# Altium PCB B215.PcbDoc
Units mm, origin at the board's own origin, x right, y up, seen from the top; angles counter-clockwise.
Board outline 22 x 40 mm, 4 copper layers (Top, Layer 1, Layer 2, Bottom), stack 1.564 mm thick; 29 components, 35 nets, 121 pads, 151 vias.
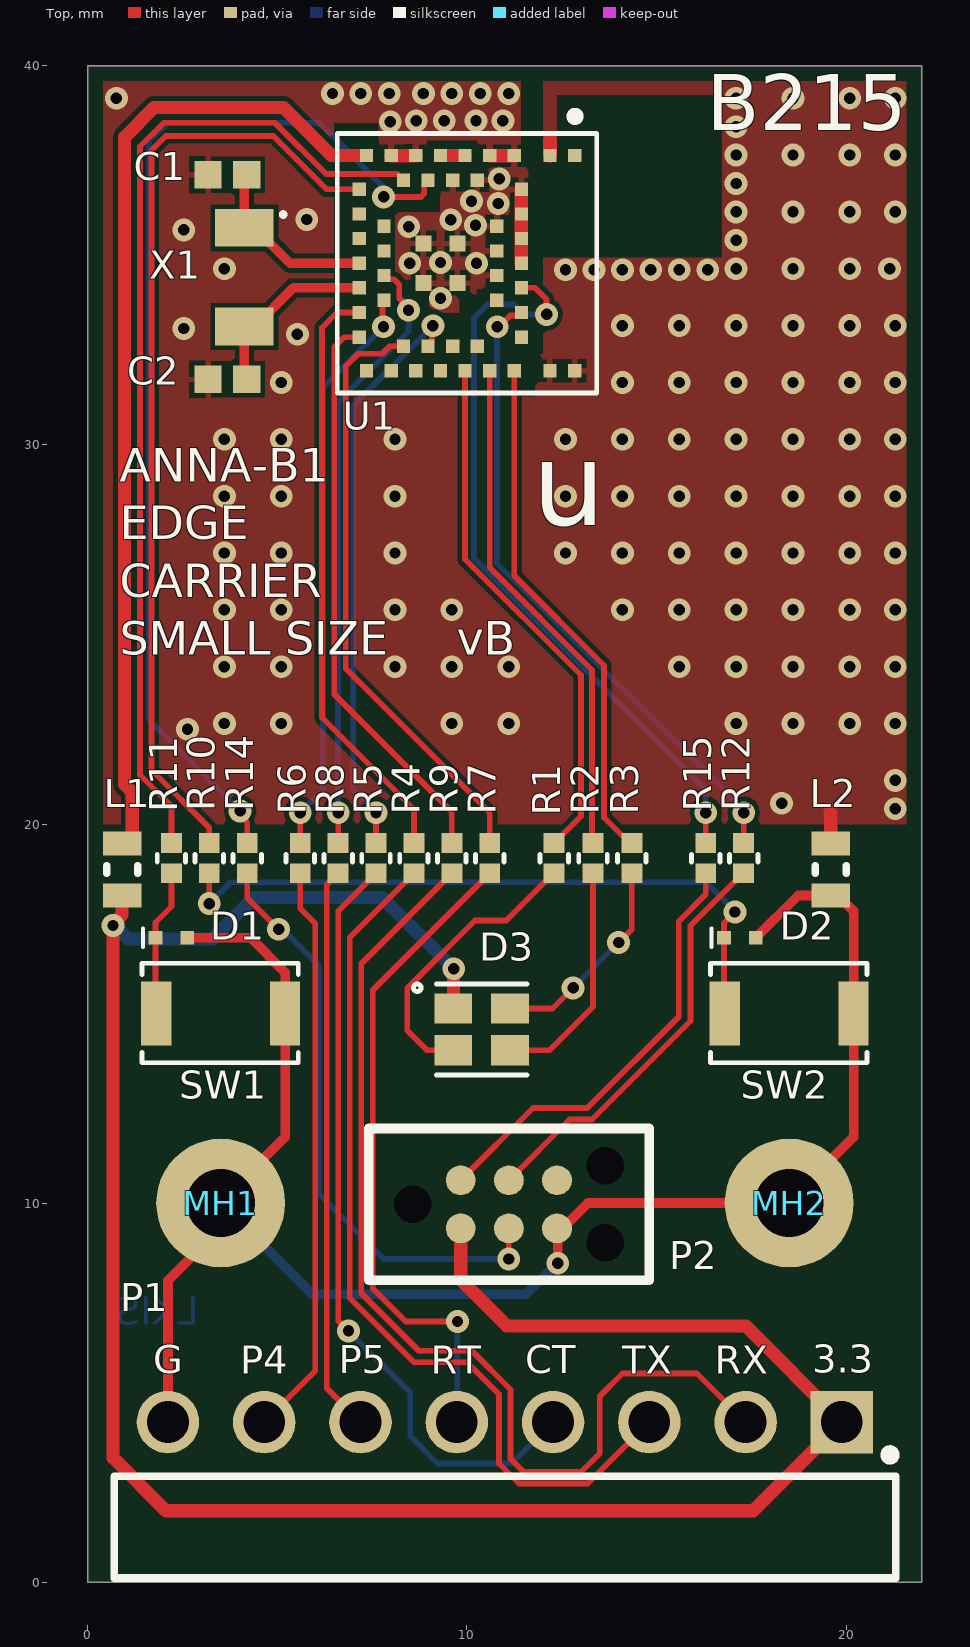
[diagram p0: Top view]
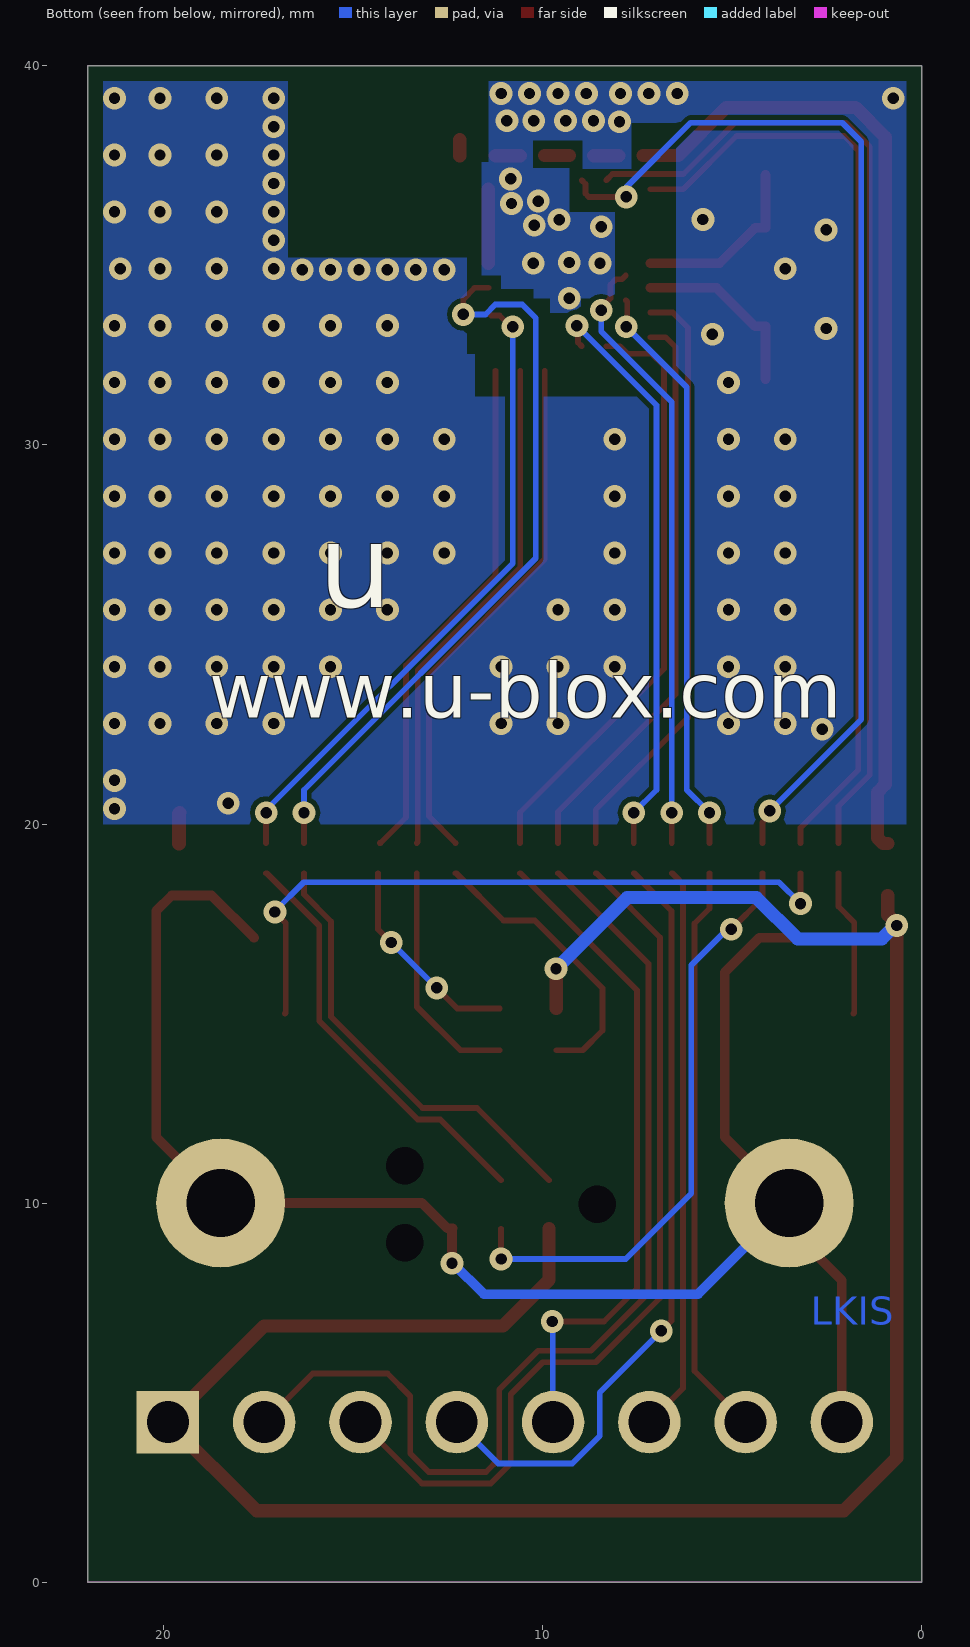
[diagram p1: Bottom view, seen from below]
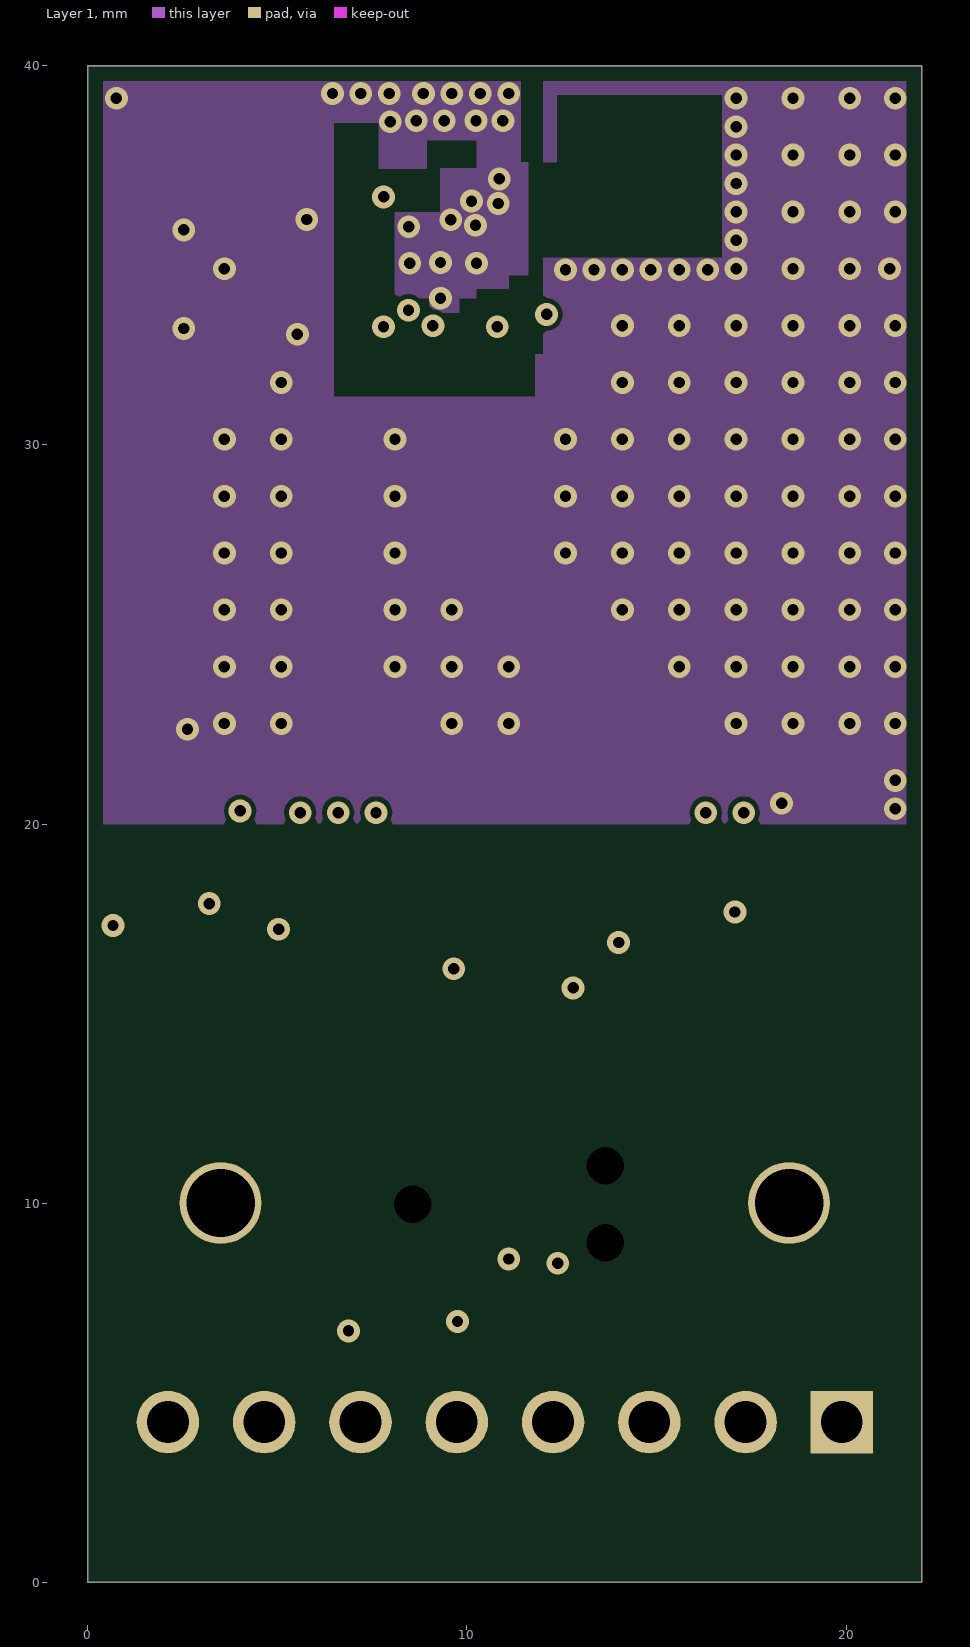
[diagram p2: Layer 1]
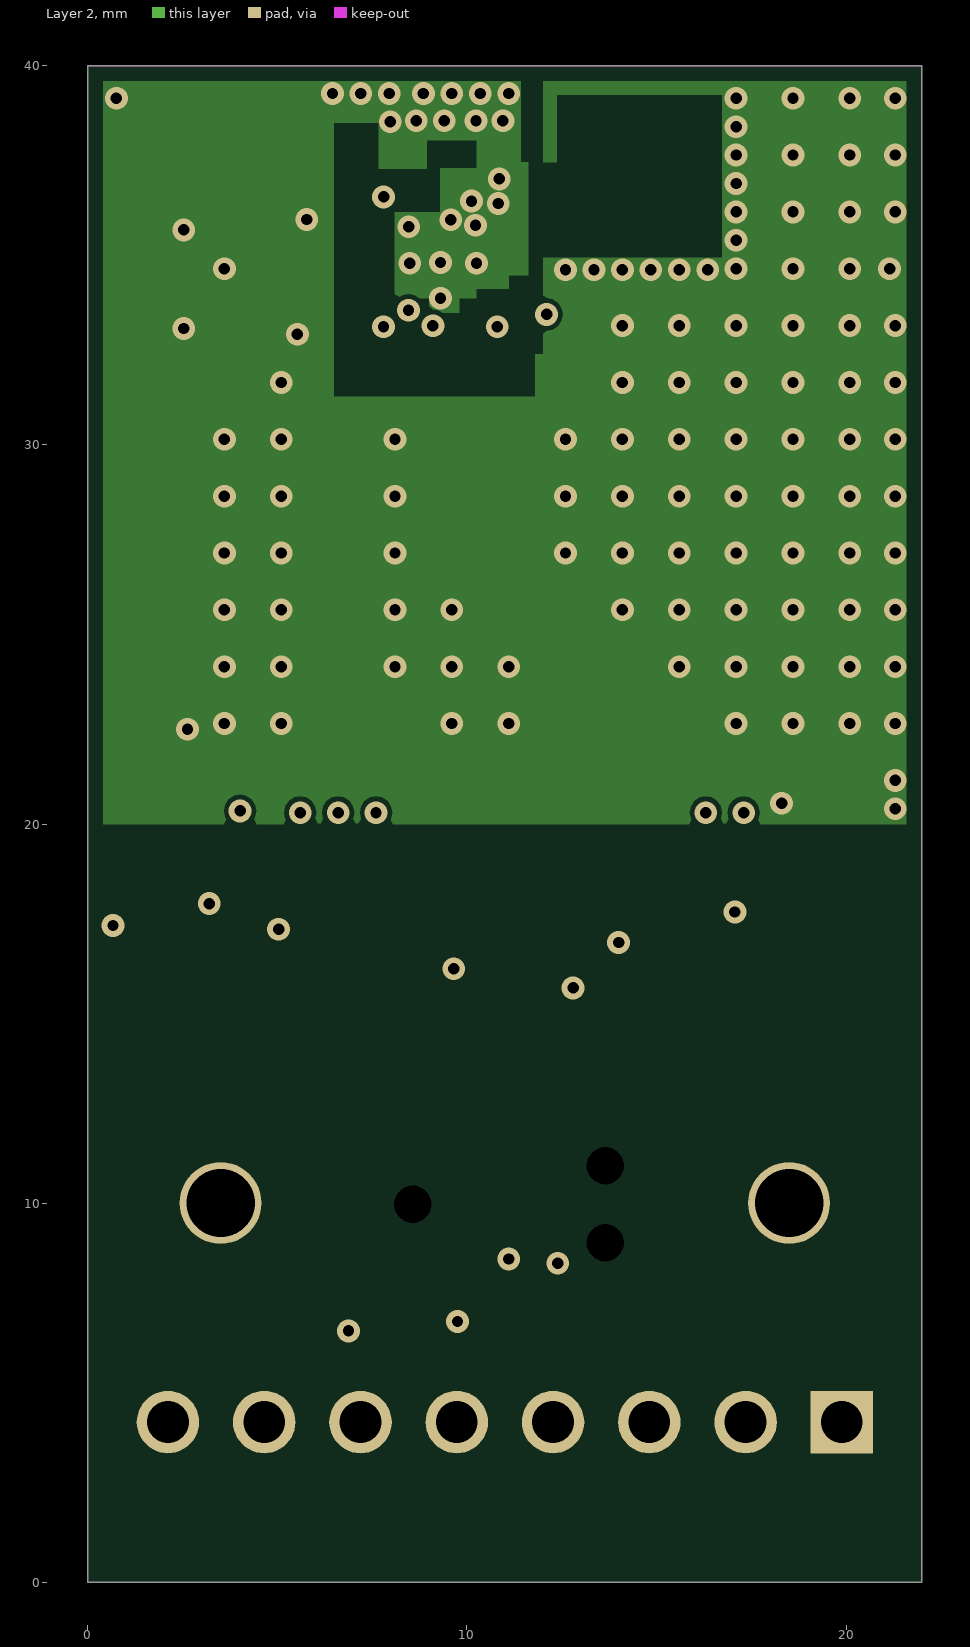
[diagram p3: Layer 2]

## Layer stack, top to bottom
Top Solder: solder mask 0.0203, Solder Resist, Dk 3.5
Top: signal copper 0.0406
Dielectric 1: prepreg 0.0711, PP-006, Dk 4.1
Layer 1: signal copper 0.035
Core: core 1.27, Core-043, Dk 4.3
Layer 2: signal copper 0.035
Dielectric 2: prepreg 0.0711, PP-006, Dk 4.1
Bottom: signal copper 0.0406
Bottom Solder: solder mask 0.0203, Solder Resist, Dk 3.5

## Board outline
0,0 22,0 22,40 0,40

## Design rules (kind name [scope] priority, off if disabled: settings)
BoardOutlineClearance [All] p1: gap=0.4 ignorepadtopadclearanceinfootprint=FALSE
Clearance "Stitching GND" [IsStitchingVia and InNet('GND') vs (IsVia and (Not IsStitchingVia)) Or IsPad] p1: gap=0.127 ignorepadtopadclearanceinfootprint=TRUE
Clearance Clearance_Poly [InPolygon vs OnLayer('Keep-Out Layer') OR (OnLayer('Multi-Layer') AND IsPad  AND Not(PadIsPlated))] p2: gap=0.127 ignorepadtopadclearanceinfootprint=TRUE
Clearance [All] p3: gap=0.127 ignorepadtopadclearanceinfootprint=FALSE except(0: Arc-Text Arc-Hole Track-Text Track-Hole SMDPad-Text SMDPad-Hole THPad-Text THPad-Hole Via-Text Via-Hole Fill-Text Fill-Hole Poly-Text Poly-Hole Region-Text Region-Hole Text-Text Text-Hole)
ComponentClearance [All] p1: gap=0.127 collisioncheckmode=3 verticalgap=0.254 showdistances=FALSE
DiffPairsRouting .14 [All] p1: maxlimit=0.254 minlimit=0.1 mostfreqgap=0.254 toplayer_maxgap=0.1 toplayer_prefgap=0.1 toplayer_minwidth=0.1 toplayer_maxwidth=0.1 toplayer_prefwidth=0.1 midlayer1_mingap=0.254 midlayer1_minwidth=0.381 midlayer1_maxwidth=0.381 midlayer1_prefwidth=0.381 midlayer2_mingap=0.254 midlayer2_minwidth=0.381 midlayer2_maxwidth=0.381 midlayer2_prefwidth=0.381 bottomlayer_maxgap=0.1 bottomlayer_prefgap=0.1 bottomlayer_minwidth=0.1 bottomlayer_maxwidth=0.1 bottomlayer_prefwidth=0.1 maxuncoupledlength=12.7
Height [All] p1: minheight=0 maxheight=25.4 prefheight=2.54
HoleSize [All] p1: absolutevalues=TRUE maxlimit=2540 minlimit=0.127 maxpercent=80.000 minpercent=20.000
HoleToHoleClearance [All] p1: gap=0.152 allowstackedmicrovias=TRUE
MinimumSolderMaskSliver [All] p1: minsoldermaskwidth=0.025
PlaneClearance [InPoly] p1: clearance=0.254
PlaneConnect [All] p1: pad.planeconnectstyle=Relief pad.reliefexpansion=0.508 pad.reliefentries=4 pad.reliefconductorwidth=0.254 pad.reliefairgap=0.254 via.planeconnectstyle=Direct via.reliefexpansion=0.508 via.reliefentries=4 via.reliefconductorwidth=0.254 via.reliefairgap=0.254
PolygonConnect ThermalVias [IsVia] p1: connectstyle=Direct reliefconductorwidth=0.254 reliefentries=4 polygonreliefangle="90 Angle" airgapwidth=0.254
PolygonConnect "PolygonConnect - Power" [InNetClass('')] p2: connectstyle=Relief reliefconductorwidth=0.254 reliefentries=4 polygonreliefangle="90 Angle" airgapwidth=0.127
PolygonConnect PolygonConnect-BGA [InComponentClass('')] p3: connectstyle=Relief reliefconductorwidth=0.152 reliefentries=4 polygonreliefangle="45 Angle" airgapwidth=0.152
PolygonConnect PolygonConnect-General [All] p4: connectstyle=Relief reliefconductorwidth=0.152 reliefentries=4 polygonreliefangle="90 Angle" airgapwidth=0.127
RoutingLayers [All] p1: top layer_v5=TRUE mid layer 1_v5=FALSE mid layer 2_v5=TRUE bottom layer_v5=TRUE
RoutingVias [All] p1: holewidth=0.3 width=0.6 viastyle="Through Hole" minholewidth=0.2 minwidth=0.5 maxholewidth=7 maxwidth=1
SMDEntry [All] p1 off: side=TRUE corner=TRUE anyangle=TRUE
SilkToBoardRegionClearance [All] p1 off:
SilkToSilkClearance [All] p1 off: silktosilkclearance=0.025
SilkToSolderMaskClearance [IsPad] p1 off: minsilkscreentomaskgap=0 clearancetoexposedcopper=TRUE
SolderMaskExpansion SolderMaskExpansion_via [IsVia] p1: expansion=-0.254 istentingtop=TRUE
SolderMaskExpansion [All] p2: expansion=0.05 istentingtop=FALSE
UnRoutedNet [All] p1: checkbadconnections=TRUE
ViasUnderSMD [All] p1: allowed=FALSE
Width [All] p1: maxlimit=0.36 minlimit=0.127 preferedwidth=0.152 toplayer_prefwidth=0.152 bottomlayer_prefwidth=0.152 minimp=50.000000 maximp=50.000000 favimp=50.000000
Width Width_1 [All] p2: maxlimit=0.36 minlimit=0.254 preferedwidth=0.254
17 further rules are at their usual default settings.

## Components (designator, comment, footprint, x,y, rotation, side; value= is the part's Value field where it differs from the comment)
C1 "Capacitor 10 pF +/- 5% 50 V 0402" CAPC1005X55X25ML05T05 3.675,37.131 r180 top value=10pF
C2 "Capacitor 10 pF +/- 5% 50 V 0402" CAPC1005X55X25ML05T05 3.675,31.731 r180 top value=10pF
D1 "110-00019" SOD-923 2.2,17 r0 top
D2 "110-00019" SOD-923 17.2,17 r0 top
D3 "115-00011" 4-PLCC 10.389,14.58 r180 top
L1 "LQW18AN56NJ00D" INDC1608X100X30LL20T10 0.9,18.8 r270 top
L2 "LQW18AN56NJ00D" INDC1608X100X30LL20T10 19.6,18.8 r90 top
MH1 "MH_M1.5DNP" MH_M1.5 3.5,10 r0 top
MH2 "MH_M1.5DNP" MH_M1.5 18.5,10 r0 top
P1 "61300811021" 61300811021 11,1.45 r0 top
P2 "TC2030-IDC-NLDNP" TC2030-IDC-NL 8.565,9.965 r0 top
R1 "180-00031499R" "RES 0402 HD" 12.3,19.1 r270 top value=499R
R2 "180-00098220R" "RES 0402 HD" 13.325,19.1 r270 top value=220R
R3 "180-00098220R" "RES 0402 HD" 14.35,19.1 r270 top value=220R
R4 "180-00098220R" "RES 0402 HD" 8.6,19.1 r270 top value=220R
R5 "180-00098220R" "RES 0402 HD" 7.6,19.1 r270 top value=220R
R6 "180-00098220R" "RES 0402 HD" 5.6,19.1 r270 top value=220R
R7 "180-00098220R" "RES 0402 HD" 10.6,19.1 r270 top value=220R
R8 "180-00098220R" "RES 0402 HD" 6.6,19.1 r270 top value=220R
R9 "180-00098220R" "RES 0402 HD" 9.6,19.1 r270 top value=220R
R10 "180-00098220R" "RES 0402 HD" 3.2,19.1 r270 top value=220R
R11 "180-00098220R" "RES 0402 HD" 2.2,19.1 r270 top value=220R
R12 "180-00098220R" "RES 0402 HD" 17.3,19.1 r90 top value=220R
R14 "180-00098220R" "RES 0402 HD" 4.2,19.1 r90 top value=220R
R15 "180-00098220R" "RES 0402 HD" 16.3,19.1 r90 top value=220R
SW1 "135-00007" B3U-1000P 3.5,15 r0 top
SW2 "135-00007" B3U-1000P 18.5,15 r0 top
U1 "ANNA-B112-OPENCPU" ANNA_LGA52S_650X650 10,34.796 r270 top
X1 "100-00005" XTAL_3215 4.125,34.431 r270 top

## Footprints (in the part's own frame and the unit in brackets; to place one, negate y for a bottom-side part, rotate by r counter-clockwise, add the part's x,y. Pads: shape width x height; smd on the part's side, far side on the other; paste and mask are expansions set on the pad)
4-PLCC [mm] "4 Pin Plastic Leaded Chip Carrier, 2mm x 2mm"
  rect 1x0.8 smd: 1(0.75,-0.55) 2(-0.75,-0.55) 3(-0.75,0.55) 4(0.75,0.55)
  silkscreen extent -1.2,-1.2 1.8,1.2, body extent -1.05,-1.05 1.05,1.05, height 1.01
61300811021 [mm]
  rect 1.65x1.65 hole 1.1: 1(8.89,2.77)
  round 1.65 hole 1.1: 2(6.35,2.77) 3(3.81,2.77) 4(1.27,2.77) 5(-1.27,2.77) 6(-3.81,2.77) 7(-6.35,2.77) 8(-8.89,2.77)
  silkscreen extent -10.31,-1.35 10.31,2.03, body extent -10.16,-7.27 10.16,3.09, height 2.58
ANNA_LGA52S_650X650 [mm]
  rect 0.35x0.35 smd paste+0 mask+0.05: 1(-2.84,2.84) 2(-2.84,2.19) 3(-2.84,1.248) 4(-2.84,0.598) 5(-2.84,-0.052) 6(-2.84,-0.702) 7(-2.84,-1.352) 8(-2.84,-2.002) 9(-2.84,-2.652) 10(-2.19,0.273) 11(-2.19,-0.377) 12(-2.19,-1.027) 13(-2.19,-1.677) 14(-1.95,-2.84) 15(-1.3,-2.84) 17(0,-2.84) 18(0.65,-2.84) 20(1.95,-2.84) 21(-0.975,-2.19) 23(0.325,-2.19) 24(0.975,-2.19) 25(2.84,-2.652) 26(2.84,-2.002) 27(2.84,-1.352) 28(2.84,-0.702) 29(2.84,-0.052) 30(2.84,0.598) 31(2.84,1.248) 32(2.84,2.19) 33(2.84,2.84) 34(2.19,-1.677) 35(2.19,-1.027) 36(2.19,-0.377) 37(2.19,0.273) 38(1.95,1.435) 39(1.3,1.435) 40(0.65,1.435) 41(0,1.435) 42(-0.65,1.435) 43(-1.3,1.435) 44(-1.95,1.435) 46(0.325,0.785) 48(-0.975,0.785)
  rect 0.35x0.35 smd mask+0.05: 16(-0.65,-2.84) 19(1.3,-2.84) 22(-0.325,-2.19) 45(0.975,0.785) 47(-0.325,0.785)
  rect 0.42x0.42 smd paste+0 mask+0.05: 49(-0.52,-0.252) 50(-0.52,-1.152) 51(0.52,-1.152) 52(0.52,-0.252)
  silkscreen extent -3.97,-3.42 3.42,3.43, body extent -3.25,-3.25 3.25,3.25, height 1.2
B3U-1000P [mm] "Button Tactile, SMT 4mm x 2.5mm, height 1.2mm"
  rect 0.8x1.7 smd: 1(-1.7,0) 2(1.7,0)
  silkscreen extent -2.07,-1.3 2.05,1.33, body extent -2,-1.25 2,1.25, height 1.6
CAPC1005X55X25ML05T05 [mm] "Chip Capacitor, 2-Leads, Body 1.05x0.55mm, IPC Low Density"
  rect 0.72x0.72 smd: 1(-0.51,0) 2(0.51,0)
  body extent -0.53,-0.28 0.53,0.28, height 0.55
INDC1608X100X30LL20T10 [mm] "Chip Inductor, 2-Leads, Body 1.8x1.1mm, IPC High Density"
  rect 0.64x1.02 smd: 1(-0.685,0) 2(0.685,0)
  silkscreen extent -0.1,-0.41 0.1,0.41, body extent -0.9,-0.55 0.9,0.55, height 1
MH_M1.5 [mm] "Mounting Hole M1.5 Metric, 3.4mm diameter pad"
  round 3.4 / inner round 2.159 / far side round 3.4 hole 1.8: 1(0,0)
"RES 0402 HD" [mm] "Chip Resistor, 2-Leads, Body 1.05x0.54mm, IPC High Density"
  rect 0.52x0.55 smd: 1(-0.4,0) 2(0.4,0)
  silkscreen extent -0.1,-0.38 0.1,0.38, body extent -0.55,-0.3 0.55,0.3, height 0.4
SOD-923 [mm] "SOD-923, 2-Leads, Body 1.25x2.50mm, IPC High Density,"
  rect 0.36x0.35 smd mask+0.05: 1(-0.42,0) 2(0.42,0)
  silkscreen extent -0.75,-0.25 -0.75,0.25, body extent -0.4,-0.3 0.4,0.3, height 0.4
TC2030-IDC-NL [mm] "Tag-Connect 6-Pin No Legs"
  round 0.9 hole 0.995 unplated: 0(0,0) 0(5.08,-1.016) 0(5.08,1.016)
  round 0.79 smd paste-0.39: 1(1.27,-0.635) 2(1.27,0.635) 3(2.54,-0.635) 4(2.54,0.635) 5(3.81,-0.635) 6(3.81,0.635)
  silkscreen extent -1.16,-2 6.24,2
XTAL_3215 [mm] "XTAL, 2-Leads, Body 1.50x3.20mm"
  rect 1x1.55 smd: 1(-1.3,0) 2(1.3,0)
  silkscreen extent -1.7,0.98 -1.6,1.07, body extent -1.65,-0.8 1.65,0.8, height 0.9

## Part data
C1 C2: library part CMP-001-00013-4, "Chip Capacitor, 10 pF, +/- 5%, 50 V, 0402 (1005 Metric)", Capacitor Type=Ceramic, Case/Package=0402, Max Operating Temperature=125°C, Min Operating Temperature=-55°C, Tolerance=5%, Voltage Rating=50V, Mounting Technology=SM, Pins=2, RoHS Compliant=True
D1 D2: "Diode, ESD9B, 3.3V, ST5G, SOD-923", Manufacturer="ON Semiconductor", Manufacturer P/N=ESD9B3.3ST5G, MFG Package=SOD-923, Package Type=SOD, Part Name="Diode TVS 3.3V SOD-923", Voltage=3.3V, Arena Link=https://app.bom.com/a/4M5DJQ9Q9SR7DV4H?v=spec.summary, Body Size="0.8mm x 0.6mm", Component Mounting Type=SMT, Diode Type=TVS, Height=0.4mm, Item_Phase=Production, Part Number=110-00019, Part_Type=Diode, Pins=2, Revision=0A, Supplier 1=Arrow, Supplier Part Number 1=ESD9B3.3ST5G, Use in new designs=Yes
D3: "LED, RGB Diffused SMT, PLCC4 4 Pin", Color=RGB, Current="20mA Red, 10mA Green, 10mA, Blue", Manufacturer="Cree, Inc.", Manufacturer P/N=CLMVB-FKA-CFHEHLCBB7a363, MFG Package=PLCC4, Package Type=Custom, Part Name="LED RGB SMT 2mm x 2mm", Supplier Part Number 1=941-CLMVBFKACFHEHLCB, Voltage=5V, Arena Link=https://app.bom.com/a/UCV39GZGZIHY581D?v=spec.summary, Body Size="2.0mm x 2.0mm", Component Mounting Type=SMT, Height=1mm, Item_Phase=Production, Mounting Type=Vertical, Number of Circuits=3, Part Number=115-00011, Part_Type=LED, Pins=4, Revision=0A, Supplier 1=Mouser, Use in new designs=Yes, Vf="2V Red, 3V Green, 3V Blue"
L1 L2: library part CMP-2000-06600-1, "Chip Inductor, 56 nH, +/-5%, 390 mA, -55 to 125 degC, 0603 (1608 Metric), RoHS, Tape and Reel", Current Rating=360mA, DC Resistance (DCR)=290mOhmMax, Frequency - Self Resonant=2.4GHz, Frequency - Test=100MHz, Inductance=56nH, Manufacturer=Murata, Operating Temperature=-55°C~125°C, Package / Case=0603(1608Metric), Package Description="2-Pin Surface Mount Device, Body 1.6 x 0.8 mm", Package Reference=0603, Q @ Freq=38@200MHz, Standard Package=1, Tolerance=±5%, Category=Inductors,Coils,Chokes, Datasheet URL=http://search.murata.co.jp/Ceramy/image/img/PDF/ENG/L0075S0080LQW18A_10.pdf, Datasheet Version=1/2019, Family=FixedInductors, Height - Seated (Max)="0.039\"(1.00mm)", Manufacturer URL=http://www.murata.com/, Material - Core=Non-Magnetic, Mounting Technology=SurfaceMount, Mounting Type=SurfaceMount, Online Catalog=LQWSeries, Other Names=490-6876-1, Packaging=CutTape(CT), Product Training Modules=InductorProductsChipRFInductors, Series=LQW18A_00, Shielding=Unshielded, Size / Dimension="0.063\"Lx0.031\"W(1.60mmx0.80mm)", Type=Wirewound
MH1 MH2: library part MH_M1.5, "1.5M screw mounting hole, plated", Added By="Jeremy D", Added Date=2015-07-09, DNP=DNP, Height=0mm, Part Number=MH_M1.5, Size="3.4mm x 3.4mm", Type="Mounting Hole"
P1: library part CMP-1502-01075-1, "THT Angled Pin Header WR-PHD, Pitch 2.54 mm, Single Row, 8 pins", Contact Resistance=20mOhm, Manufacturer="Wurth Elektronik", Operating Temperature=-40to105degC, Rated Current=3A, Withstanding Voltage=500VAC, Working Voltage=250VAC, Datasheet URL=https://katalog.we-online.de/em/datasheet/6130xx11021.pdf, Gender=Male, Manufacturer Part Number=61300811021, Manufacturer URL=http://www.we-online.de, Mounting Technology=THT, Orientation=Angled, Package Reference=61300811021, Packaging=Bag, Part Number=61300811021, Pin Number=8, Pitch=2.54mm, Publisher=WurthElektronik, Row Number=Single
P2: library part TC2030-IDC-NL, "CON PADS FOR CBL PLUG-OF-NAILS 6-PIN NO LEGS", Manufacturer="TAG Connect", Added By="Paul B", Added Date=2015-04-22, DNP=DNP, Height=0, Manufacturer P/N=TC2030-IDC-NL, Part Number=TC2030-IDC-NL, Size="6.731mm x 12.446mm"
R1: library part 180-00031, "Resistor, 499ohm, 1%, 1/16W, 0402", Manufacturer="Rohm Semiconductor", Manufacturer 2="Samsung Electro-Mechanics America, Inc", Manufacturer P/N=MCR01MRTF4990, Manufacturer P/N 2=RC1005F4990CS, Part Name="RES SMD 499 OHM 1% 1/16W 0402", Power=1/16W, Supplier Part Number 1=RHM499CDCT-ND, Tolerance="+/- 1%", Alternate Footprint Ref="RES 0402", Arena Link=https://app.bom.com/a/Q8RZ5CVCVEDU1SS5?v=spec.summary, Component Mounting Type=SMT, Height=0.4mm, Item_Phase=Production, Part Number=180-00031, Part_Type=Resistor, Pins=2, Revision=0D, Size=0402, Supplier 1=Digi-Key, Supplier 2=Digi-Key, Supplier Part Number 2=1276-3992-1-ND, Use in new designs=Yes
R2 R3: library part 180-00098, "Resistor, 220ohm, 5%, 1/16W, 0402.", Manufacturer="Panasonic Electronic Components", Manufacturer 2="Samsung Electro-Mechanics America, Inc", Manufacturer P/N=ERJ-2GEJ221X, Manufacturer P/N 2=RC1005J221CS, Part Name="RES SMD 220 OHM 5% 1/16W 0402", Power=1/16W, Supplier Part Number 1=P220JCT-ND, Tolerance="+/- 5%", Alternate Footprint Ref="RES 0402", Arena Link=https://app.bom.com/a/8Q9HNUDUDWVBJC30?v=spec.summary, Component Mounting Type=SMT, Height=0.4mm, Item_Phase=Production, Part Number=180-00098, Part_Type=Resistor, Pins=2, Revision=0C, Size=0402, Supplier 1=Digi-Key, Supplier 2=Digi-Key, Supplier Part Number 2=1276-4360-1-ND, Use in new designs=Yes
R4 R5 R6 R7 R8 R9 R10 R11 R12 R14 R15: library part 180-00098, "Resistor, 220ohm, 5%, 1/16W, 0402.", Manufacturer 1="Samsung Electro-Mechanics America, Inc", Manufacturer 2="Panasonic Electronic Components", Manufacturer Part Number 1=RC1005J221CS, Manufacturer Part Number 2=ERJ-2GEJ221X, Max Operating Temp=155, Min Operating Temp=-55, Part Name="RES SMD 220 OHM 5% 1/16W 0402", Power=1/16W, Supplier Part Number 1=1276-4360-1-ND, Tolerance="+/- 5%", Voltage=None, Height=0.4mm, Item Phase="In Production", Part Number=180-00098, Pins=2, Revision=0C, Size=0402, Supplier 1=Digi-Key, Supplier 2=Digi-Key, Supplier Part Number 2=P220JCT-ND, UBX Code=None, Use in new designs=Yes
SW1 SW2: "Button, Momentary SPST-NO, 0.05A, 12V, 3mm x 2.5mm", Current=50mA, Manufacturer="Omron Electronics Inc-EMC Div", Manufacturer P/N=B3U-1000P, Part Name="SWITCH TACTILE SPST-NO 0.05A 12V", Supplier Part Number 1=SW1020CT-ND, Voltage=12VDC, Arena Link=https://app.bom.com/a/TBU28FYFYHGV5FQ0?v=spec.summary, Body Size="3mm x 2.5mm", Component Mounting Type=SMT, Height=1.2mm, Item_Phase=Production, Part Number=135-00007, Part_Type=Button, Pins=2, Revision=0A, Supplier 1=Digi-Key, Switch/Button Circuit=SPST, Switch/Button Function=Off-Mom, Use in new designs=Yes
U1: "u-blox ANNA-B112 Bluetooth 5 LE module", Manufacturer=u-blox, Part Description="Stand-alone Bluetooth low energy module"
X1: "XTAL, 2Pin, 32.768kHz, 7pF 20ppm", Frequency=32.768kHz, Frequency Tolerance=20ppm, Manufacturer=Epson, Manufacturer 2="AVX Corporation", Manufacturer P/N="FC-135 32.7680KA-AG3", Manufacturer P/N 2=ST3215SB32768C0HPWBB, MFG Package=2-SMD, Part Name="XTAL 32.768kHz 7pF 20ppm 3215", Supplier Part Number 1=SER4086CT-ND, Arena Link=https://app.bom.com/a/L3MU07Q7Q98O5PC8?v=spec.summary, Body Size="3.2mm x 1.5mm", CL=7pF, Component Mounting Type=SMT, Height=0.9mm, Item_Phase=Production, Part Number=100-00005, Part_Type=Crystal/Oscillator, Pins=2, Revision=0C, Supplier 1=Digi-Key, Supplier 2=Digi-Key, Supplier Part Number 2=1253-1113-1-ND, Use in new designs=Yes

## Via types
v1: diameter 0.6, hole 0.3, Top to Bottom, tented both sides, 151 vias

## Nets (pads, with @x,y where several pads share a name; then routed paths per layer and width w, separated by ;. In a path a pad name is that pad's centre, name@x,y a point inside that pad or via, vN(x,y) a via of type N, cw(c..) or ccw(c..) an arc to the next point about the centre after c; other vN are vias at no path point)
3V3: D3.1 L1.2 P1.1 P2.1 | length 60.1
  Top w0.35: L1.2 0.9,17.601 0.66,17.361 v1(0.66,17.323) 0.66,3.277 2.057,1.88 17.55,1.88 P1.1 17.354,6.756 11.049,6.756 9.835,7.97 P2.1 ; D3.1 9.644,15.135 9.644,16.172 v1(9.65,16.178) v1@9.652,16.18
  Bottom w0.35: v1(0.66,17.323) 0.703,17.323 1.059,16.967 3.277,16.967 4.369,18.059 7.768,18.059 v1(9.65,16.178)
3V3_M: L1.1 U1.9 | length 26.1
  Top w0.35: L1.1 1.023,19.485 1.168,19.63 1.168,20.841 0.965,21.044 0.965,38.125 1.747,38.907 5.156,38.907 6.427,37.636 U1.9
ANT_INT_EDGE: U1.5 U1.6 | length 0.6
  Top w0.35: U1.6 U1.5
B_M: R3.1 U1.31 | length 13.7
  Top w0.152: U1.31 11.248,26.547 13.613,24.182 13.613,20.172 14.285,19.5 R3.1@14.3,19.5
BLUE: D3.2 R3.2 | length 5.6
  Top w0.152: D3.2 12.255,15.13 v1(12.8,15.675) ; v1(14,16.875) 14.35,17.225 R3.2
  Bottom w0.152: v1(12.8,15.675) v1(14,16.875)
BT1_M: R11.1 U1.13 | length 26.6
  Top w0.152: R11.1 2.2,20.47 1.374,21.296 1.374,37.874 2.004,38.504 4.93,38.504 6.285,37.149 8.16,37.149 U1.13
BT2_M: R10.1 U1.14 | length 25.1
  Top w0.152: R10.1 3.2,19.9 1.678,21.422 1.678,37.778 2.051,38.151 4.889,38.151 6.293,36.746 U1.14
BUTTON1: D1.1 R11.2 SW1.1 | length 3.9
  Top w0.152: SW1.1 1.78,15.02 D1.1 1.78,17.401 2.2,17.821 R11.2
BUTTON2: D2.1 R10.2 SW2.1 | length 18.1
  Top w0.152: v1(3.2,17.9) R10.2 ; SW2.1 16.78,15.02 D2.1 16.78,17.39 v1(17.069,17.678)
  Bottom w0.152: v1(3.2,17.9) 3.766,18.466 16.307,18.466 17.069,17.704 v1(17.069,17.678)
CLK1: C1.1 U1.17 X1.1 | length 4.8
  Top w0.254: C1.1@4.125,37.131 X1.1 4.4,35.731 5.335,34.796 U1.17
CLK2: C2.1 U1.18 X1.2 | length 4.9
  Top w0.254: C2.1@4.125,31.731 X1.2 4.4,33.131 5.415,34.146 U1.18
CTS: P1.4 R5.2 | length 20.6
  Top w0.152: v1(6.875,6.625) 6.604,6.896 6.604,17.704 7.401,18.501 7.401,18.516 7.585,18.7 R5.2
  Bottom w0.152: v1(6.875,6.625) 8.5,5 8.5,3.85 9.225,3.125 11.175,3.125 P1.4
CTS_M: R5.1 U1.35 | length 15.3
  Top w0.152: R5.1 v1(7.6,20.3) ; U1.35 9.072,32.705 v1@9.072,33.118
  Bottom w0.152: v1(7.6,20.3) 7,20.9 7,31.046 v1(9.1,33.146)
G_M: R2.1 U1.30 | length 13.6
  Top w0.152: U1.30 10.598,26.767 13.3,24.065 13.3,19.525 R2.1
GND: D1.2 D2.2 L2.1 MH1.1 MH2.1 P1.8 P2.5 SW1.2 SW2.2 | length 45.3
  Top w0.254: P1.8 2.11,7.954 3.5,9.344 MH1.1 3.5,10.036 5.2,11.736 5.2,16.085 4.285,17 D1.2 ; v1(12.395,8.407) 12.395,9.31 P2.5 12.52,9.33 13.19,10 MH2.1 18.5,10.036 20.2,11.736 SW2.2 20.2,17.705 19.79,18.115 L2.1 18.74,18.115 17.625,17 D2.2
  Bottom w0.254: MH1.1 5.905,7.595 11.557,7.595 12.37,8.407 v1(12.395,8.407)
GND_M: C1.2 C2.2 L2.2 U1.2 U1.3 U1.4 U1.7 U1.8 U1.10 U1.11 U1.32 U1.33 U1.41 U1.42 U1.43 U1.44 U1.46 U1.47 U1.48 U1.49 U1.50 U1.51 U1.52 | length 4.5
  Top w0.36: U1.8 U1.7 ; U1.4 U1.3 ; U1.41 U1.42 U1.43 U1.44 ; U1.2 12.19,38.046 ; 19.583,20.295 19.6,20.278 L2.2
  other v1: 21.3,20.4 18.3,20.55 21.3,21.15 2.625,22.5 3.6,22.65 5.1,22.65 9.6,22.65 11.1,22.65 17.1,22.65 18.6,22.65 20.1,22.65 21.3,22.65 3.6,24.15 5.1,24.15 8.1,24.15 9.6,24.15 11.1,24.15 15.6,24.15 17.1,24.15 18.6,24.15 20.1,24.15 21.3,24.15 3.6,25.65 5.1,25.65 8.1,25.65 9.6,25.65 14.1,25.65 15.6,25.65 17.1,25.65 18.6,25.65 20.1,25.65 21.3,25.65 3.6,27.15 5.1,27.15 8.1,27.15 12.6,27.15 14.1,27.15 15.6,27.15 17.1,27.15 18.6,27.15 20.1,27.15 21.3,27.15 3.6,28.65 5.1,28.65 8.1,28.65 12.6,28.65 14.1,28.65 15.6,28.65 17.1,28.65 18.6,28.65 20.1,28.65 21.3,28.65 3.6,30.15 5.1,30.15 8.1,30.15 12.6,30.15 14.1,30.15 15.6,30.15 17.1,30.15 18.6,30.15 20.1,30.15 21.3,30.15 5.1,31.65 14.1,31.65 15.6,31.65 17.1,31.65 18.6,31.65 20.1,31.65 21.3,31.65 5.525,32.925 2.525,33.075 14.1,33.15 15.6,33.15 17.1,33.15 18.6,33.15 20.1,33.15 21.3,33.15 9.3,33.873 12.6,34.625 13.35,34.625 14.1,34.625 14.85,34.625 15.6,34.625 16.35,34.625 3.6,34.65 17.1,34.65 18.6,34.65 20.1,34.65 21.15,34.65 8.49,34.796 9.3,34.816 10.25,34.796 17.1,35.4 2.525,35.675 8.46,35.756 10.225,35.796 5.775,35.95 9.57,35.946 17.1,36.15 18.6,36.15 20.1,36.15 21.3,36.15 10.825,36.371 10.12,36.436 17.1,36.9 10.85,37.021 17.1,37.65 18.6,37.65 20.1,37.65 21.3,37.65 17.1,38.4 7.976,38.532 8.661,38.557 9.398,38.557 10.236,38.557 10.947,38.557 0.75,39.15 17.1,39.15 18.6,39.15 20.1,39.15 21.3,39.15 6.45,39.275 7.2,39.275 7.95,39.275 8.85,39.275 9.6,39.275 10.35,39.275 11.1,39.275
GREEN: D3.3 R2.2 | length 6.2
  Top w0.152: D3.3 12.175,14.03 13.325,15.18 R2.2
nRESET: P2.3 R14.1 | length 15.8
  Top w0.152: R14.1 4.2,18.05 v1(5.029,17.221) ; v1(11.1,8.522) P2.3@11.1,9.322
  Bottom w0.152: v1(5.029,17.221) 5.134,17.221 6.084,16.271 6.084,10.248 7.81,8.522 v1(11.1,8.522)
nRST_M: R14.2 U1.12 | length 28.2
  Top w0.152: v1(4.013,20.345) 4.013,20.224 4.2,20.037 R14.2 ; v1(7.8,36.546) 8.785,36.546 8.874,36.635 8.874,36.887 U1.12
  Bottom w0.152: v1(4.013,20.345) 1.6,22.759 1.6,38 2.1,38.5 6.1,38.5 v1@7.8,36.8
P0.04: P1.7 R6.2 | length 15.2
  Top w0.152: P1.7 5.996,5.566 5.996,17.372 5.6,17.768 R6.2
P0.04_M: R6.1 U1.24 | length 15.3
  Top w0.152: R6.1 v1(5.6,20.3) ; v1(7.798,33.122) 7.772,33.147 7.772,33.783 U1.24
  Bottom w0.152: v1(5.6,20.3) 6.2,20.9 6.2,31.524 v1(7.798,33.122)
P0.05: P1.6 R8.2 | length 15
  Top w0.152: R8.2 6.585,18.7 6.401,18.516 6.401,18.501 6.3,18.4 6.3,5.11 P1.6
P0.05_M: R8.1 U1.23 | length 16.1
  Top w0.152: R8.1 v1(6.6,20.3) ; U1.23 7.909,34.372 8.074,34.372 8.213,34.233 8.213,33.875 8.458,33.63 v1(8.458,33.553)
  Bottom w0.152: v1(6.6,20.3) 6.596,20.304 6.596,31.132 8.458,32.995 v1(8.458,33.553)
R_M: R1.1 U1.29 | length 14
  Top w0.152: U1.29 9.948,26.987 13.005,23.931 13.005,20.205 R1.1
RED: D3.4 R1.2 | length 7.7
  Top w0.152: D3.4 8.948,14.03 8.425,14.553 8.425,15.664 10.212,17.451 11.036,17.451 12.285,18.7 R1.2
RTS: P1.5 R7.2 | length 17.5
  Top w0.152: v1(9.75,6.875) 8.385,6.875 7.516,7.744 7.516,15.616 10.401,18.501 10.401,18.516 10.585,18.7 R7.2
  Bottom w0.152: P1.5 9.74,4.23 9.74,6.865 v1(9.75,6.875)
RTS_M: R7.1 U1.34 | length 15.9
  Top w0.152: U1.34 7.96,32.606 7.764,32.41 7.13,32.41 6.804,32.084 6.804,24.096 10.6,20.3 R7.1
RXD: P1.2 R9.2 | length 27.7
  Top w0.152: R9.2 9.585,18.7 9.401,18.516 9.401,18.501 7.212,16.312 7.212,7.618 8.726,6.104 10.126,6.104 11.151,5.079 11.151,3.249 11.5,2.9 13.009,2.9 13.5,3.391 13.5,4.9 14.1,5.5 16.07,5.5 P1.2
RXD_M: R9.1 U1.20 | length 15.1
  Top w0.152: U1.20 6.76,32.846 6.5,32.586 6.5,23.421 9.6,20.321 R9.1
SWCLK: P2.4 R12.1 | length 11
  Top w0.152: P2.4 12.705,12.2 13.3,12.2 15.9,14.8 15.9,17.315 17.101,18.516 17.285,18.7 R12.1
SWCLK_M: R12.2 U1.39 | length 17.1
  Top w0.152: v1(10.795,33.122) 10.846,33.122 11.143,33.419 11.358,33.419 U1.39 ; R12.2 v1(17.3,20.3)
  Bottom w0.152: v1(10.795,33.122) 10.795,26.873 17.3,20.368 v1(17.3,20.3)
SWDIO: P2.2 R15.1 | length 11.6
  Top w0.152: P2.2 11.739,12.504 13.174,12.504 15.585,14.915 15.585,17.43 16.3,18.145 R15.1
SWDIO_M: R15.2 U1.40 | length 19.7
  Top w0.152: U1.40 11.8,34.146 12.1,33.846 v1(12.1,33.446) ; R15.2 v1(16.3,20.3)
  Bottom w0.152: v1(12.1,33.446) 11.512,33.446 11.252,33.706 10.541,33.706 10.185,33.35 10.185,27.015 16.3,20.9 v1(16.3,20.3)
TXD: P1.3 R4.2 | length 23.6
  Top w0.152: R4.2 8.585,18.7 8.401,18.516 8.401,18.501 6.908,17.008 6.908,7.492 8.6,5.8 10,5.8 10.846,4.954 10.846,3.124 11.374,2.596 13.186,2.596 P1.3
TXD_M: R4.1 U1.19 | length 15.8
  Top w0.152: U1.19 6.572,33.496 6.172,33.096 6.172,22.809 8.6,20.381 R4.1
pads on no net: P2.0 P2.6 U1.1 U1.15 U1.16 U1.21 U1.22 U1.25 U1.26 U1.27 U1.28 U1.36 U1.37 U1.38 U1.45

## Polygon pours and split planes (outlines as drawn)
GND_M on Top "GND_M_L01_P021" (solid, remove dead copper, pour order 21): 0,39.85 22,39.85 22,20 0,20
GND_M on Top "GND_M_L01_P020" (solid, pour order 20): 12.37,38.22 12.01,38.22 12.01,39.599 16.73,39.599 16.73,39.246 12.37,39.246
GND_M on Bottom "GND_M_L04_P022" (solid, remove dead copper, pour order 22): 0,39.85 22,39.85 22,20 0,20
GND_M on Layer 1 "GND_M_L02_P023" (solid, pour order 23): 0,39.85 22,39.85 22,20 0,20
GND_M on Layer 2 "GND_M_L03_P024" (solid, pour order 24): 0,39.85 22,39.85 22,20 0,20

## Keep-outs
Keep-Out Layer:
  the board outline again, w0.025

## Other copper
Top:
  pour cut-out: 9.825,9.7 9.825,10.225 10.2,10.6 12.025,10.6 12.375,10.25 12.375,9.675 12.03,9.33 10.195,9.33 10.125,9.4
  pour cut-out: 16.73,34.946 12.01,34.946 12.01,32.396 11.8,32.396 11.8,31.276 6.48,31.276 6.48,38.496 7.67,38.496 7.67,37.286 8.94,37.286 8.94,38.046 10.26,38.046 10.26,37.306 9.3,37.306 9.3,36.146 8.1,36.146 8.1,33.866 9,33.866 9,33.486 9.8,33.486 9.8,33.866 10.24,33.866 10.24,34.116 11.1,34.116 11.1,34.476 11.61,34.476 11.61,37.456 11.42,37.456 11.42,39.596 12.01,39.596 12.01,37.456 12.37,37.456 12.37,39.246 16.73,39.246
Layer 1:
  pour cut-out: 16.73,34.946 12.01,34.946 12.01,32.396 11.8,32.396 11.8,31.276 6.48,31.276 6.48,38.496 7.67,38.496 7.67,37.286 8.94,37.286 8.94,38.046 10.26,38.046 10.26,37.306 9.3,37.306 9.3,36.146 8.1,36.146 8.1,33.866 9,33.866 9,33.486 9.8,33.486 9.8,33.866 10.24,33.866 10.24,34.116 11.1,34.116 11.1,34.476 11.61,34.476 11.61,37.456 11.42,37.456 11.42,39.596 12.01,39.596 12.01,37.456 12.37,37.456 12.37,39.246 16.73,39.246
Layer 2:
  pour cut-out: 16.73,34.946 12.01,34.946 12.01,32.396 11.8,32.396 11.8,31.276 6.48,31.276 6.48,38.496 7.67,38.496 7.67,37.286 8.94,37.286 8.94,38.046 10.26,38.046 10.26,37.306 9.3,37.306 9.3,36.146 8.1,36.146 8.1,33.866 9,33.866 9,33.486 9.8,33.486 9.8,33.866 10.24,33.866 10.24,34.116 11.1,34.116 11.1,34.476 11.61,34.476 11.61,37.456 11.42,37.456 11.42,39.596 12.01,39.596 12.01,37.456 12.37,37.456 12.37,39.246 16.73,39.246
Bottom:
  pour cut-out: 0.457,6.325 0.457,7.375 3.082,7.375 3.082,6.325
  pour cut-out: 16.73,34.946 12.01,34.946 12.01,32.396 11.8,32.396 11.8,31.276 6.48,31.276 6.48,38.496 7.67,38.496 7.67,37.286 8.94,37.286 8.94,38.046 10.26,38.046 10.26,37.306 9.3,37.306 9.3,36.146 8.1,36.146 8.1,33.866 9,33.866 9,33.486 9.8,33.486 9.8,33.866 10.24,33.866 10.24,34.116 11.1,34.116 11.1,34.476 11.61,34.476 11.61,37.456 11.42,37.456 11.42,39.596 12.37,39.596 16.73,39.596
  text "LKIS" at 2.928,6.538 h1.27

## Silkscreen, mask and mechanical layers (free items; w line width, h text height)
Top Overlay:
  text "B215" at 16.321,37.816 h2.54
  text "u" at 11.724,27.154 h3.81
  text "vB" at 9.728,24.181 h1.52
  text "ANNA-B1 / EDGE / CARRIER / SMALL SIZE" at 0.84,24.176 h1.52
  text "G" at 1.724,5.263 h1.27
  text "P5" at 6.618,5.263 h1.27
  text "CT" at 11.534,5.263 h1.27
  text "3.3" at 19.111,5.265 h1.27
  text "P4" at 4.022,5.25 h1.27
  text "RT" at 9.05,5.25 h1.27
  text "TX" at 14.092,5.25 h1.27
  text "RX" at 16.535,5.25 h1.27
Bottom Overlay:
  text "u" at 15.913,24.994 h3.81
  text "www.u-blox.com" at 18.796,22.31 h2.5
Route Tool Path:
  the board outline again, w0.127